# Altium PCB PinBoardJTAG20_10.PcbDoc
Units mm, origin at the board's own origin, x right, y up, seen from the top; angles counter-clockwise.
Board outline 152.4 x 101.6 mm, 2 copper layers (Top Layer, Bottom Layer); 19 components, 17 nets, 143 pads, 0 vias.
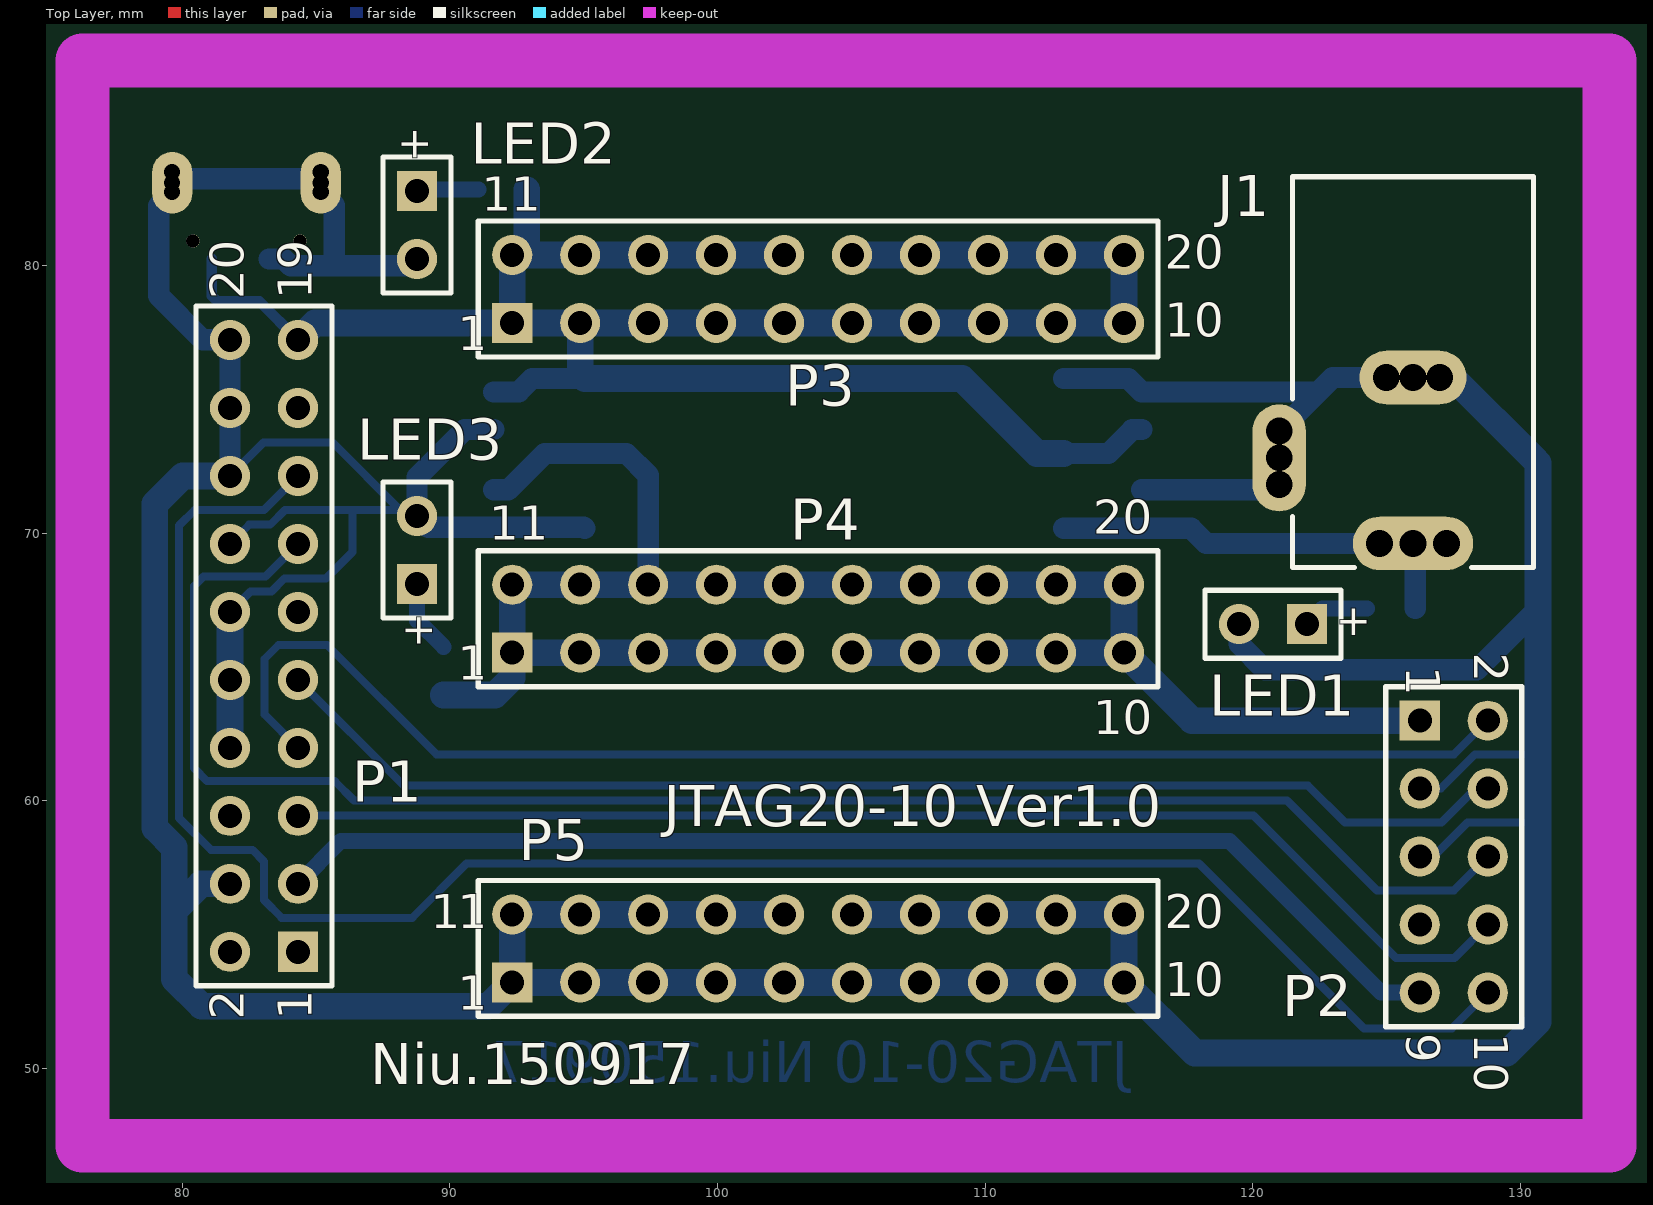
[diagram p0: Top Layer view]
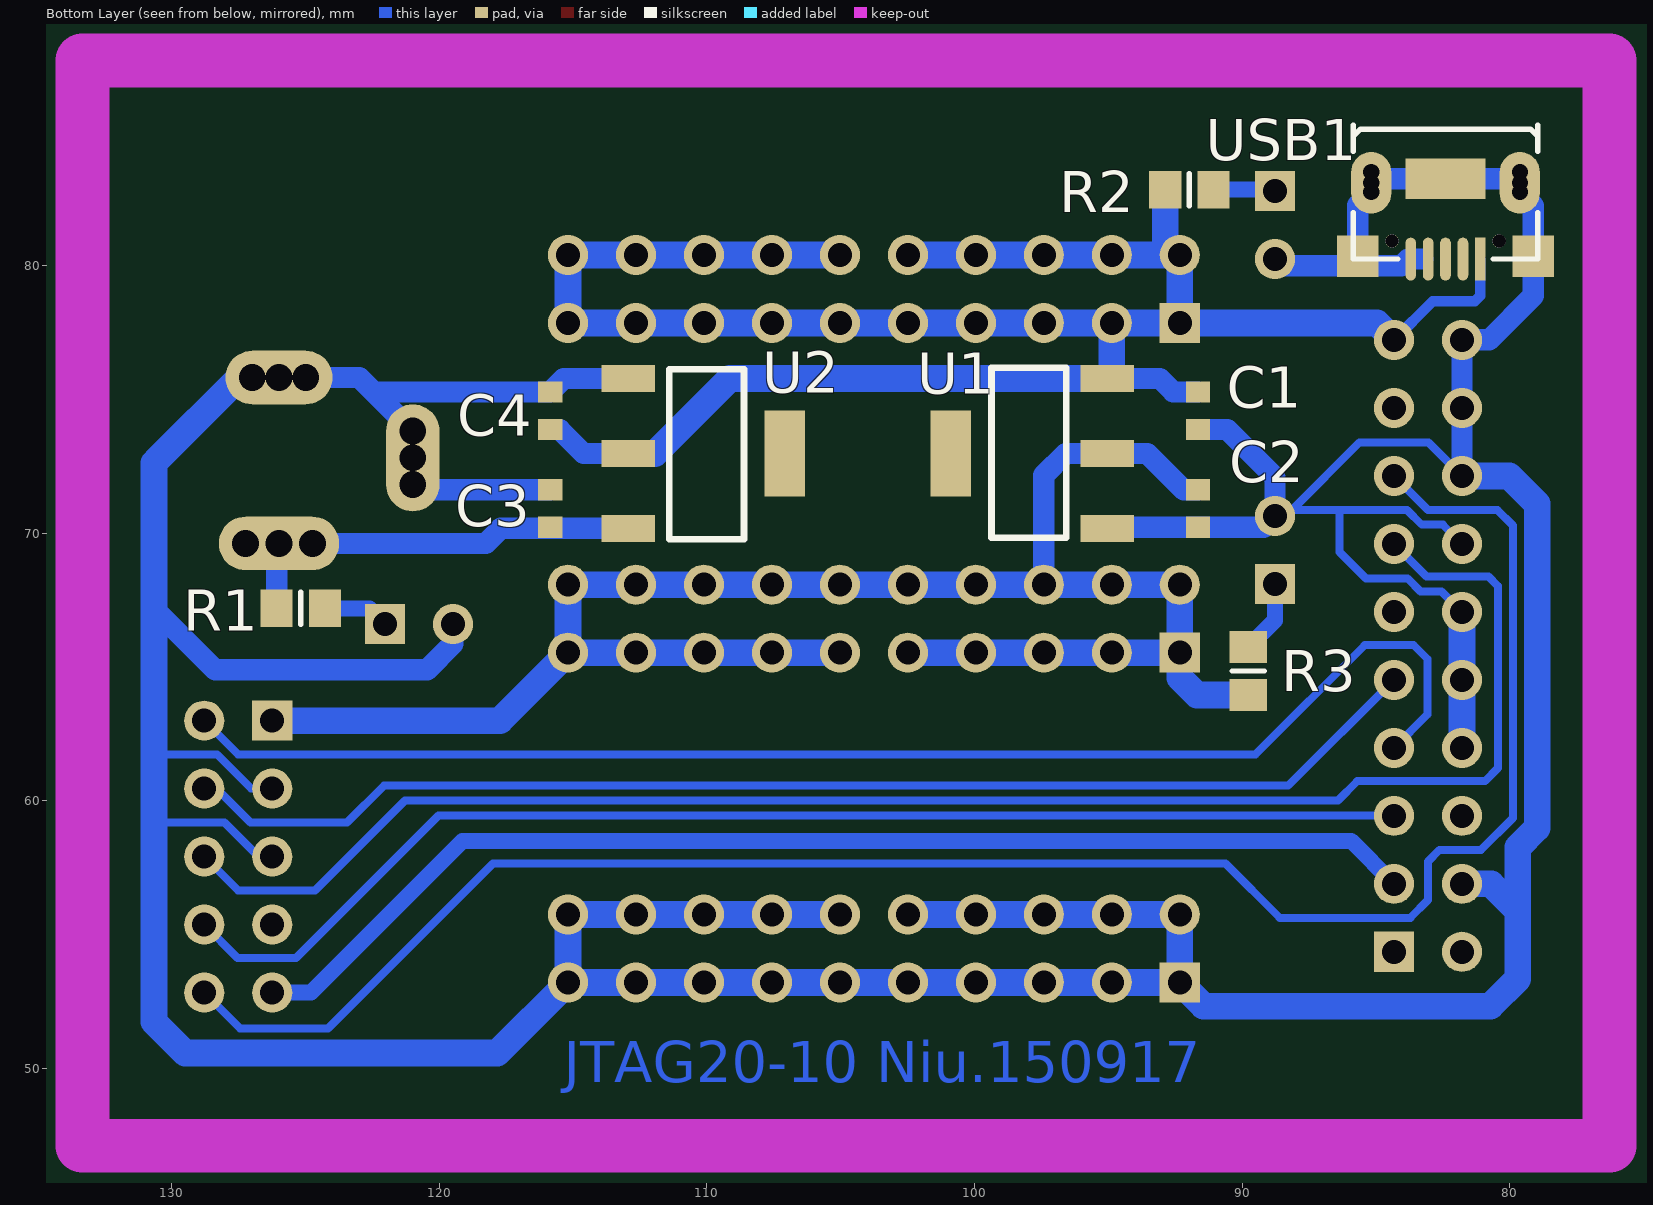
[diagram p1: Bottom Layer view, seen from below]

## Layer stack, top to bottom
Top Solder: solder mask 0.0102, Solder Resist, Dk 3.5
Top Layer: signal copper 0.0356
Dielectric 1: dielectric 0.32, FR-4, Dk 4.8
Bottom Layer: signal copper 0.0356
Bottom Solder: solder mask 0.0102, Solder Resist, Dk 3.5

## Board outline
25.4,25.4 177.8,25.4 177.8,127 25.4,127

## Design rules (kind name [scope] priority, off if disabled: settings)
Clearance [All] p1: gap=0.254
PolygonConnect [All] p1: connectstyle=Relief reliefconductorwidth=0.254 reliefentries=4 polygonreliefangle="90 Angle" airgapwidth=0.254
RoutingVias [All] p1: holewidth=0.711 width=1.27 viastyle="Through Hole" minholewidth=0.711 minwidth=1.27 maxholewidth=0.711 maxwidth=1.27
SolderMaskExpansion [All] p1: expansion=0.102
UnpouredPolygon [All] p1: allowunpoured=FALSE
Width [InNet('GND','VIN','5V','3.3V')] p1: maxlimit=1 minlimit=0.3 preferedwidth=0.6
Width Width_1 [All] p2: maxlimit=0.6 minlimit=0.3 preferedwidth=0.5
29 further rules are at their usual default settings.

## Components (designator, comment, footprint, x,y, rotation, side; value= is the part's Value field where it differs from the comment)
C1 "Cap Semi" 1608[0603] 91.643,74.571 r90 bottom
C2 "Cap Semi" 1608[0603] 91.643,70.913 r90 bottom
C3 "Cap Semi" 1608[0603] 115.849,70.913 r270 bottom
C4 "Cap Semi" 1608[0603] 115.849,74.571 r270 bottom
J1 "PWR2.5" KLD-0202 125.984,83.312 r270 top
LED1 "LED1" BAT-2 120.752,66.599 r180 top
LED2 "LED1" BAT-2 88.773,81.509 r270 top
LED3 "LED1" BAT-2 88.773,69.367 r90 top
P1 "Header 10X2" HDR2X10 84.328,54.356 r90 top
P2 "Header 5X2" HDR2X5 126.238,62.992 r270 top
P3 "Header 10X2A" HDR2X10_CEN 92.329,77.851 r0 top
P4 "Header 10X2A" HDR2X10_CEN 92.329,65.532 r0 top
P5 "Header 10X2A" HDR2X10_CEN 92.329,53.213 r0 top
R1 "Res3" 6-0805_N 125.171,67.183 r180 bottom
R2 "Res3" 6-0805_N 91.973,82.829 r180 bottom
R3 "Res3" 6-0805_N 89.764,64.846 r90 bottom
U1 "AMS1117-3.3" AMS1117-SOT223 98.222,73.003 r90 bottom
U2 "AMS1117-5.0" AMS1117-SOT223 109.753,72.945 r270 bottom
USB1 "USB" MICROUSB_D2S6 82.245,82.271 r180 bottom

## Footprints (in the part's own frame and the unit in brackets; to place one, negate y for a bottom-side part, rotate by r counter-clockwise, add the part's x,y. Pads: shape width x height; smd on the part's side, far side on the other; paste and mask are expansions set on the pad)
6-0805_N [mm] "Chip Resistor, Body 2.0x1.2mm, IPC Medium Density"
  rect 1.2x1.4 smd: 1(-0.9,0) 2(0.9,0)
  silkscreen extent 0,-0.6 0,0.6, body extent -1.07,-0.7 1.07,0.7, height 0.7
1608[0603] [mm] "Chip Capacitor, Body 1.6x0.8mm, IPC High Density"
  rect 0.8x0.9 smd: 1(-0.7,0) 2(0.7,0)
  body extent -0.87,-0.48 0.87,0.48, height 1.3
AMS1117-SOT223 [mm]
  rect 3.2x1.5 smd: 0(-0.029,2.667)
  rect 1x2 smd: 1(-2.829,-3.175) 2(-0.029,-3.175) 3(2.771,-3.175)
  silkscreen extent -3.17,-1.65 3.17,1.14
BAT-2 [mm] "Battery; 2 Leads"
  rect 1.5x1.5 hole 0.9: 1(-1.27,0)
  round 1.5 hole 0.9: 2(1.27,0)
  silkscreen extent -2.54,-1.27 2.54,1.27
HDR2X5 [mm] "Connector; Header; 5x2 Position"
  rect 1.5x1.5 hole 0.9: 1(0,0)
  round 1.5 hole 0.9: 2(0,2.54) 3(2.54,0) 4(2.54,2.54) 5(5.08,0) 6(5.08,2.54) 7(7.62,0) 8(7.62,2.54) 9(10.16,0) 10(10.16,2.54)
  silkscreen extent -1.27,-1.27 11.43,3.81
HDR2X10 [mm] "Connector; Header; 10x2 Position"
  rect 1.5x1.5 hole 0.9: 1(0,0)
  round 1.5 hole 0.9: 2(0,2.54) 3(2.54,0) 4(2.54,2.54) 5(5.08,0) 6(5.08,2.54) 7(7.62,0) 8(7.62,2.54) 9(10.16,0) 10(10.16,2.54) 11(12.7,0) 12(12.7,2.54) 13(15.24,0) 14(15.24,2.54) 15(17.78,0) 16(17.78,2.54) 17(20.32,0) 18(20.32,2.54) 19(22.86,0) 20(22.86,2.54)
  silkscreen extent -1.27,-1.27 24.13,3.81
HDR2X10_CEN [mm] "Connector; Header; 10x2 Position"
  rect 1.5x1.5 hole 0.9: 1(0,0)
  round 1.5 hole 0.9: 2(2.54,0) 3(5.08,0) 4(7.62,0) 5(10.16,0) 6(12.7,0) 7(15.24,0) 8(17.78,0) 9(20.32,0) 10(22.86,0) 11(0,2.54) 12(2.54,2.54) 13(5.08,2.54) 14(7.62,2.54) 15(10.16,2.54) 16(12.7,2.54) 17(15.24,2.54) 18(17.78,2.54) 19(20.32,2.54) 20(22.86,2.54)
  silkscreen extent -1.27,-1.27 24.13,3.81
KLD-0202 [mm] "DC Power Jack, 2.5mm, KLD Series, PCB Mount"
  oval 2x4.5 hole 1: 1(13.7,0)
  round 1.5 hole 1: 1A(13.7,-1.25) 1B(13.7,1.25) 2A(7.5,-1) 2B(7.5,1) 3A(9.5,-5) 3B(11.5,-5)
  oval 2x4 hole 1: 2(7.5,0)
  oval 4x2 hole 1: 3(10.5,-5)
  silkscreen extent 0,-4.5 14.6,4.5
MICROUSB_D2S6 [mm]
  round 0.5 hole 0.5: 0(-2.157,-1.357) 0(1.843,-1.357)
  rect 0.4x1.6 smd: 1(1.143,-2.032)
  oval 0.4x1.6 smd: 2(0.493,-2.032) 3(-0.157,-2.032) 4(-0.807,-2.032) 5(-1.457,-2.032)
  rect 1.55x1.55 smd: 6(-3.429,-1.929) 6(3.124,-1.929)
  round 0.8 hole 0.6: 6(-2.932,0.468) 6(-2.932,1.218) 6(2.618,0.468) 6(2.618,1.218)
  oval 1.5x2.3 hole 0.6: 6(-2.932,0.818) 6(2.618,0.818)
  rect 3x1.5 smd: 6(-0.157,0.968)
  silkscreen extent -3.61,-2.03 3.29,2.97

## Part data
C1 C2 C3 C4: "Capacitor (Semiconductor SIM Model)"
J1: "Low Voltage Power Supply Connector"
LED1 LED2 LED3: "Typical RED GaAs LED"
P1 P3 P4 P5: "Header, 10-Pin, Dual row"
P2: "Header, 5-Pin, Dual row"
R1 R2 R3: "Resistor"

## Nets (pads, with @x,y where several pads share a name; then routed paths per layer and width w, separated by ;. In a path a pad name is that pad's centre, name@x,y a point inside that pad or via, vN(x,y) a via of type N, cw(c..) or ccw(c..) an arc to the next point about the centre after c; other vN are vias at no path point)
3.3V: C2.2 P2.1 P4.1 P4.2 P4.3 P4.4 P4.5 P4.6 P4.7 P4.8 P4.9 P4.10 P4.11 P4.12 P4.13 P4.14 P4.15 P4.16 P4.17 P4.18 P4.19 P4.20 R3.1 U1.2 | length 74.9
  Bottom Layer w0.8: C2.2 92.187,71.613 93.548,72.974 U1.2 96.596,72.974 97.409,72.161 P4.13
  Bottom Layer w1: R3.1 91.683,63.946 92.329,64.592 P4.1 ; P4.5 P4.4 P4.3 P4.2 P4.1 ; P4.6 P4.7 P4.8 P4.9 P4.10 ; P2.1 117.729,62.992 P4.10 ; P4.1 P4.11 P4.12 P4.13 P4.14 P4.15 P4.16 P4.17 P4.18 P4.19 P4.20 P4.10
5V: C1.2 C4.2 P1.19 P3.1 P3.2 P3.3 P3.4 P3.5 P3.6 P3.7 P3.8 P3.9 P3.10 P3.11 P3.12 P3.13 P3.14 P3.15 P3.16 P3.17 P3.18 P3.19 P3.20 R2.1 U1.3 U2.2 USB1.1 | length 92.6
  Bottom Layer w0.4: USB1.1 81.102,78.867 81.305,78.664 82.88,78.664 P1.19
  Bottom Layer w0.8: C1.2 92.568,75.271 93.072,75.774 U1.3 ; U2.2 114.605,72.974 115.501,73.871 C4.2
  Bottom Layer w1: P1.19 84.963,77.851 P3.1 ; R2.1 92.873,80.935 P3.11 ; P3.15 P3.14 P3.13 P3.12 P3.11 ; P3.16 P3.17 P3.18 P3.19 P3.20 P3.10 P3.9 P3.8 P3.7 P3.6 P3.5 P3.4 P3.3 P3.2 ; U2.2 111.938,72.974 109.138,75.774 U1.3 94.869,75.952 P3.2 ; P3.1 P3.11 ; P3.1 P3.2
DBGRQ: P1.17
GND: C1.1 C2.1 C3.1 C4.1 J1.2 J1.2A J1.2B J1.3 J1.3A J1.3B LED1.2 LED2.2 LED3.2 P1.4 P1.8 P1.10 P1.12 P1.14 P1.16 P1.18 P1.20 P2.3 P2.5 P5.1 P5.2 P5.3 P5.4 P5.5 P5.6 P5.7 P5.8 P5.9 P5.10 P5.11 P5.12 P5.13 P5.14 P5.15 P5.16 P5.17 P5.18 P5.19 P5.20 U1.1 U2.1 USB1.4 USB1.5 USB1.6 | length 243.3
  Bottom Layer w0.3: P1.12 82.555,67.823 83.338,67.823 83.816,68.301 85.369,68.301 86.36,69.291 86.36,70.866 ; P1.14 82.504,70.312 83.287,70.312 83.841,70.866 86.36,70.866 ; P1.16 83.033,73.381 85.623,73.381 LED3.2@88.138,70.866 ; LED3.2@88.57,70.434 LED3.2@88.138,70.866 ; P2.5 126.746,57.912 128.016,59.182 130.658,59.182 ; P2.3 127.021,60.452 128.291,61.722 130.581,61.722 130.658,61.798 ; 86.36,70.866 LED3.2@88.138,70.866
  Bottom Layer w0.8: P1.16 P1.18 P1.20 80.772,77.216 79.121,78.867 79.121,80.342 79.121,82.232 79.627,82.739 80.127,83.239 82.402,83.239 84.677,83.239 85.177,82.739 85.674,82.242 USB1.6@85.674,80.342 ; 83.256,80.239 USB1.5 83.799,80.239 84.053,79.985 88.773,79.985 LED2.2 ; LED3.2 88.773,72.085 90.559,73.871 C1.1 ; LED3.2@88.862,70.549 89.197,70.213 C2.1 95.008,70.213 U1.1 ; U2.1 115.346,75.774 C4.1 122.443,75.271 ; C3.1 120.785,71.613 J1.3B ; LED1.2 119.482,65.862 120.447,64.897 128.372,64.897 130.658,67.183 ; J1.3A 122.443,75.271 ; J1.2B J1.2 J1.2A 122.984,75.812 122.443,75.271 ; 130.556,68.555 130.556,72.72
  Bottom Layer w1: P1.4 80.696,56.896 79.705,55.905 ; P1.8 P1.12 ; P1.16 80.02,72.136 78.979,71.095 78.979,58.985 79.705,58.259 79.705,55.905 ; P5.15 P5.14 P5.13 P5.12 P5.11 P5.1 ; P5.16 P5.17 P5.18 P5.19 P5.20 P5.10 ; J1.2B 127.464,75.812 130.556,72.72 ; 130.658,72.619 130.658,67.183 130.658,61.798 130.658,59.182 130.658,51.74 129.489,50.571 117.831,50.571 P5.10 ; 79.705,55.905 79.705,53.34 80.721,52.324 91.44,52.324 P5.1 ; P5.1 P5.2 P5.3 P5.4 P5.5 P5.6 P5.7 P5.8 P5.9 P5.10
JNRST: P1.3 P2.9 | length 44.9
  Bottom Layer w0.6: P1.3 85.928,58.496 119.126,58.496 124.79,52.832 P2.9
JTCK: P1.9 P2.4 | length 47.2
  Bottom Layer w0.3: P1.9 88.282,60.562 122.064,60.562 123.444,59.182 127.051,59.182 128.321,60.452 P2.4
JTDI: P1.5 P2.8 | length 47.2
  Bottom Layer w0.3: P1.5 84.328,59.454 120.022,59.454 125.349,54.127 127.533,54.127 P2.8
JTDO: P1.13 P2.6 | length 62.1
  Bottom Layer w0.3: P1.13 83.109,68.377 80.797,68.377 80.437,68.016 80.437,61.219 80.924,60.731 85.7,60.731 86.423,60.008 121.272,60.008 124.638,56.642 127.508,56.642 P2.6
JTMS: P1.7 P2.2 | length 52
  Bottom Layer w0.3: P1.7 83.083,63.221 83.083,65.303 83.591,65.811 85.42,65.811 89.51,61.722 127.508,61.722 P2.2
NetLED1_1: LED1.1 R1.2 | length 2.5
  Bottom Layer w0.6: LED1.1 122.606,67.183 R1.2
NetLED2_1: LED2.1 R2.2 | length 2.3
  Bottom Layer w0.6: LED2.1 88.824,82.829 R2.2
NetLED3_1: LED3.1 R3.2 | length 2.8
  Bottom Layer w0.6: LED3.1 88.773,66.737 R3.2
RESET: P1.15 P2.10 | length 71.4
  Bottom Layer w0.3: P1.15 83.058,70.866 80.467,70.866 79.883,70.282 79.883,59.36 81.077,58.166 82.626,58.166 83.058,57.734 83.058,56.286 83.718,55.626 88.595,55.626 90.627,57.658 117.983,57.658 124.155,51.486 127.432,51.486 P2.10
RTCK: P1.11
VIN: C3.2 J1.1 J1.1A J1.1B R1.1 U2.3 | length 15
  Bottom Layer w0.8: U2.3 117.7,70.174 118.262,69.612 J1.1A J1.1A@124.734,69.108 ; J1.1 126.071,69.525 R1.1
VSUPPLY: P1.2
VTREF: P1.1
pads on no net: P1.6 P2.7 U1.0 U2.0 USB1.0 USB1.2 USB1.3

## Keep-outs
Keep-Out Layer:
  lines w2: 133.325,87.478 133.325,47.117 76.276,47.117 76.276,87.655 133.325,87.655

## Other copper
Bottom Layer:
  text "JTAG20-10 Niu.150917" at 115.341,49.479 h1.52

## Silkscreen, mask and mechanical layers (free items; w line width, h text height)
Top Overlay:
  text "JTAG20-10 Ver1.0" at 97.993,59.055 h1.52
  text "Niu.150917" at 87.02,49.403 h1.52

## Text inside footprints (layer, text, board x,y; h text height)
LED1: Top Overlay "+" at 124.422,67.176 h1.15 r180
LED2: Top Overlay "+" at 88.196,85.179 h1.15 r270
LED3: Top Overlay "+" at 89.35,65.697 h1.15 r90
P1: Top Overlay "20" at 82.296,78.74 h1.27 r90; Top Overlay "19" at 84.836,78.74 h1.27 r90; Top Overlay "1" at 84.836,51.816 h1.27 r90; Top Overlay "2" at 82.296,51.816 h1.27 r90
P2: Top Overlay "10" at 128.27,51.308 h1.27 r270; Top Overlay "9" at 125.73,51.308 h1.27 r270; Top Overlay "1" at 125.73,65.024 h1.27 r270; Top Overlay "2" at 128.27,65.532 h1.27 r270
P3: Top Overlay "20" at 116.713,79.883 h1.27; Top Overlay "10" at 116.713,77.343 h1.27; Top Overlay "11" at 91.186,82.042 h1.27; Top Overlay "1" at 90.297,76.835 h1.27
P4: Top Overlay "20" at 114.046,69.977 h1.27; Top Overlay "10" at 114.046,62.484 h1.27; Top Overlay "11" at 91.465,69.748 h1.27; Top Overlay "1" at 90.297,64.516 h1.27
P5: Top Overlay "20" at 116.713,55.245 h1.27; Top Overlay "10" at 116.713,52.705 h1.27; Top Overlay "1" at 90.297,55.245 h1.27; Top Overlay "1" at 89.281,55.245 h1.27; Top Overlay "1" at 90.297,52.197 h1.27